# Altium PCB Electro_tester.PcbDoc
Units mm, origin at the board's own origin, x right, y up, seen from the top; angles counter-clockwise.
Board outline 152.4 x 101.6 mm, 2 copper layers (Top Layer, Bottom Layer); 66 components, 44 nets, 230 pads, 0 vias.
Unrouted connection lines stored in the file: 139.
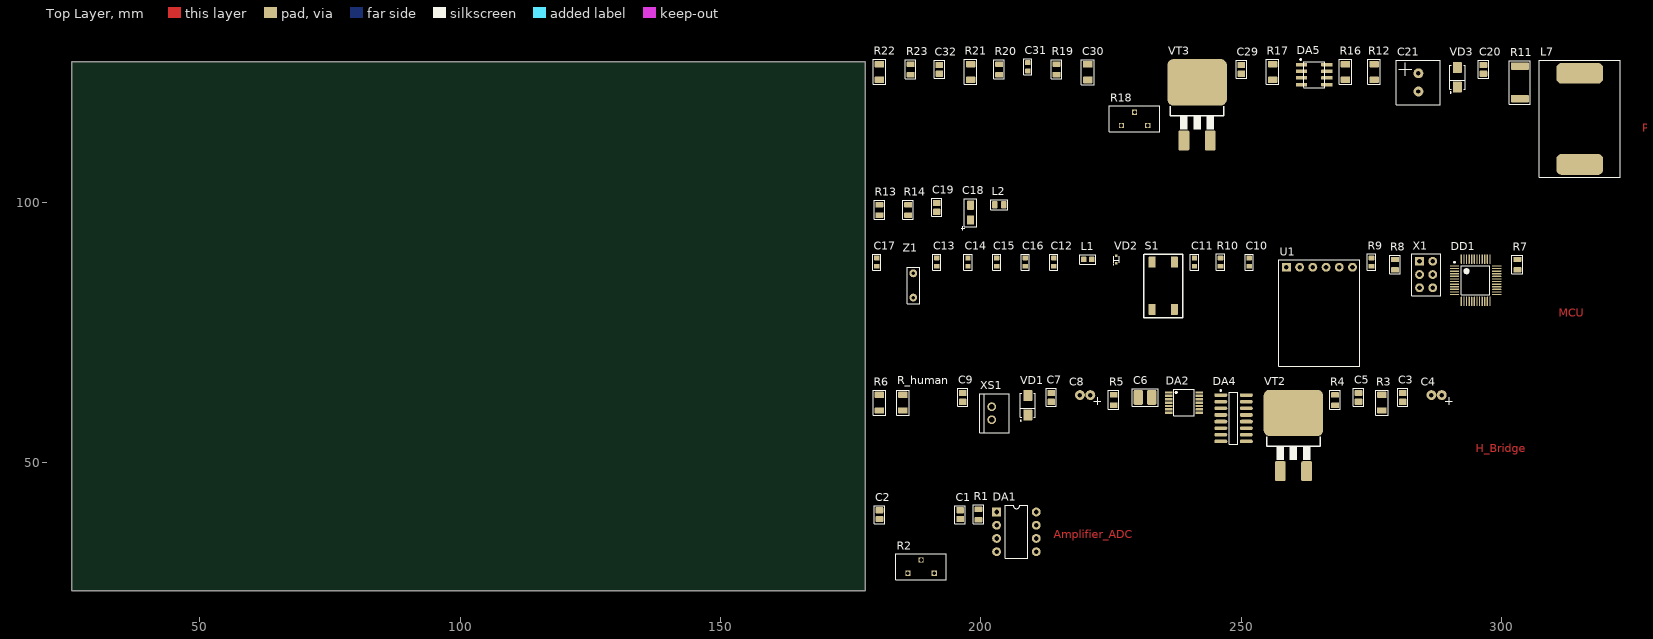
[diagram p0: Top Layer view]
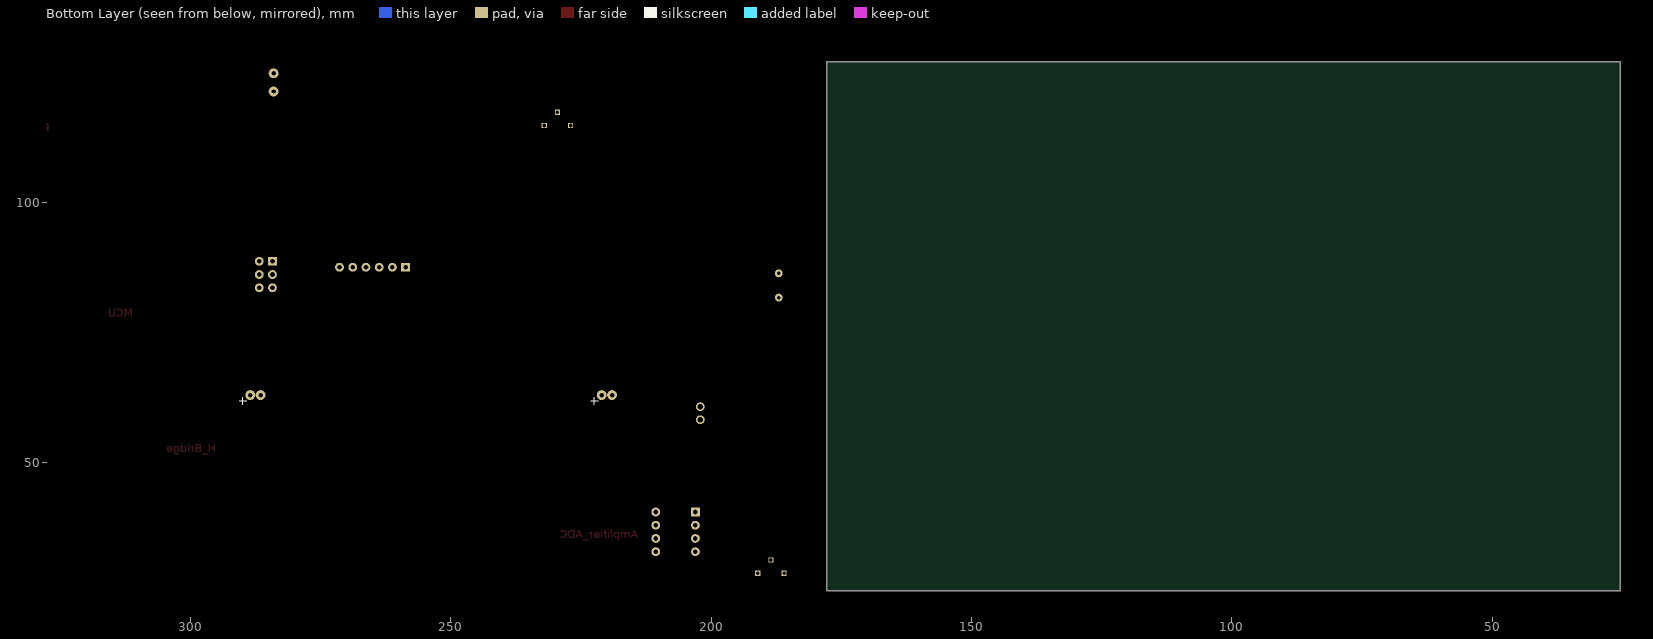
[diagram p1: Bottom Layer view, seen from below]

## Layer stack, top to bottom
Top Solder: solder mask 0.0102, Solder Resist, Dk 3.5
Top Layer: signal copper 0.0356
Dielectric 1: dielectric 0.32, FR-4, Dk 4.8
Bottom Layer: signal copper 0.0356
Bottom Solder: solder mask 0.0102, Solder Resist, Dk 3.5

## Board outline
25.4,25.4 177.8,25.4 177.8,127 25.4,127

## Design rules (kind name [scope] priority, off if disabled: settings)
Clearance [All] p1: gap=0.254 ignorepadtopadclearanceinfootprint=FALSE except(0: Arc-Hole Track-Hole SMDPad-Hole THPad-Hole Via-Hole Fill-Hole Poly-Hole Region-Hole Text-Hole)
PolygonConnect [All] p1: connectstyle=Relief reliefconductorwidth=0.254 reliefentries=4 polygonreliefangle="90 Angle" airgapwidth=0.254
RoomDefinition PWM_Controller [InComponentClass('PWM_Controller')] p1: confinementstyle=ConfineIn formatcopy=TRUE lockcomponents=FALSE outline 179,104.5 322.999,104.5 322.999,130.5 179,130.5
RoomDefinition Power [InComponentClass('Power')] p2: confinementstyle=ConfineIn formatcopy=TRUE lockcomponents=FALSE outline 179,94 206,94 206,104 179,104
RoomDefinition MCU [InComponentClass('MCU')] p3: confinementstyle=ConfineIn formatcopy=TRUE lockcomponents=FALSE outline 178.5,68 305.499,68 305.499,93 178.5,93
RoomDefinition H_Bridge_Driver [InComponentClass('H_Bridge_Driver')] p4: confinementstyle=ConfineIn formatcopy=TRUE lockcomponents=FALSE outline 179,46 290.999,46 290.999,67.5 179,67.5
RoomDefinition Amplifier_ADC [InComponentClass('Amplifier_ADC')] p5: confinementstyle=ConfineIn formatcopy=TRUE lockcomponents=FALSE outline 179,27 212,27 212,45 179,45
RoutingVias [All] p1: holewidth=0.711 width=1.27 viastyle="Through Hole" minholewidth=0.711 minwidth=1.27 maxholewidth=0.711 maxwidth=1.27
SolderMaskExpansion [All] p1: expansion=0.102
Width [All] p1: maxlimit=0.254 minlimit=0.254 preferedwidth=0.254
30 further rules are at their usual default settings.

## Classes and differential pairs
component class PWM_Controller: C20 C21 C29 C30 C31 C32 DA5 L7 R11 R12 R16 R17 R18 R19 R20 R21 R22 R23 VD3 VT3
component class Power: C18 C19 L2 R13 R14
component class MCU: C10 C11 C12 C13 C14 C15 C16 C17 DD1 L1 R7 R8 R9 R10 S1 U1 VD2 X1 Z1
component class H_Bridge_Driver: C3 C4 C5 C6 C7 C8 C9 DA2 DA4 R3 R4 R5 R6 R_human VD1 VT2 XS1
component class Amplifier_ADC: C1 C2 DA1 R1 R2

## Components (designator, comment, footprint, x,y, rotation, side; value= is the part's Value field where it differs from the comment)
C1 "Capacitor" C0805 196,40 r90 top value=1мк
C2 "Capacitor" C0805 180.5,40 r90 top value=0,1мк
C3 "Capacitor" C0805 280.999,62.5 r90 top value=0,1мк
C4 "Capacitor" K50-35(5X11) 287.499,63.5 r90 top value=22мк
C5 "Capacitor" C0805 272.499,62.5 r90 top value=0,1мк
C6 "Capacitor" C1210 231.5,62.5 r0 top value=0,1мк
C7 "Capacitor" C0805 213.5,62.5 r90 top value=0,1мк
C8 "Capacitor" K50-35(5X11) 220,63.5 r90 top value=22мк
C9 "Capacitor" C0805 196.5,62.5 r90 top value=0,1мк
C10 "Capacitor" C0603 251.499,88.5 r90 top value=0,1мк
C11 "Capacitor" C0603 241,88.5 r90 top value=0,1мк
C12 "Capacitor" C0603 214,88.5 r90 top value=22
C13 "Capacitor" C0603 191.5,88.5 r90 top value=0,1мк
C14 "Capacitor" C0603 197.5,88.5 r90 top value=0,1мк
C15 "Capacitor" C0603 203,88.5 r90 top value=0,1мк
C16 "Capacitor" C0603 208.5,88.5 r90 top value=0,1мк
C17 "Capacitor" C0603 180,88.5 r90 top value=22
C18 "Capacitor_pol" "TANTAL CASE A" 198,98 r90 top value=10мк
C19 "Capacitor" C0805 191.5,99 r90 top value=4,7мк
C20 "Capacitor" C0805 296.499,125.5 r90 top value=0,1мк
C21 "Capacitor_pol" K50-35(8X16) 283.999,123 r0 top value=4,7мк
C29 "Capacitor" C0805 249.999,125.5 r90 top value=4700
C30 "Capacitor" C1206 220.5,125 r90 top value=0,1мк
C31 "Capacitor" C0603 209,126 r90 top value=100
C32 "Capacitor" C0805 192,125.5 r90 top value=470
DA1 "INA122" DIP8 203,40.5 r0 top
DA2 "TXB0104" TSSOP14 239,61.5 r0 top
DA4 "IR2110S" SO16 248.5,58.5 r0 top
DA5 "UC384X" SO8 263.999,124.5 r0 top
DD1 "STM32F103C8T6TR" LQFP48 294.999,85 r0 top
L1 "Inductor" L0603 220.5,89 r0 top value=0
L2 "Inductor" L0805 203.5,99.5 r0 top value=0,18мкГн
L7 "Inductor" SDR2207 314.999,116 r0 top value=100мкГн
R1 "Resistor_0,125Вт" R0805 199.5,40 r90 top value=1к
R2 "Potentiometer" 3296Y 188.5,30 r90 top value=2к
R3 "Resistor_0,25Вт" R1206 276.999,61.5 r90 top value=0
R4 "Resistor_0,125Вт" R0805 267.999,62 r90 top value=47
R5 "Resistor_0,125Вт" R0805 225.5,62 r90 top value=1к
R6 "Resistor_0,25Вт" R1206 180.5,61.5 r90 top value=0
R7 "Resistor_0,125Вт" R0805 302.999,88 r90 top value=1к
R8 "Resistor_0,125Вт" R0805 279.499,88 r90 top value=2,4к
R9 "Resistor_0,062Вт" R0603 274.999,88.5 r90 top value=10к
R10 "Resistor_0,062Вт" R0603 246,88.5 r90 top value=10к
R11 "Resistor_1Вт" R2512 303.499,123 r90 top value=62к
R12 "Resistor_0,25Вт" R1206 275.499,125 r90 top value=1,2м
R13 "Resistor_0,125Вт" R0805 180.5,98.5 r90 top value=0
R14 "Resistor_0,125Вт" R0805 186,98.5 r90 top value=0
R16 "Resistor_0,25Вт" R1206 269.999,125 r90 top value=10к
R17 "Resistor_0,25Вт" R1206 255.999,125 r90 top value=0
R18 "Potentiometer" 3296Y 229.5,116 r90 top value=20к
R19 "Resistor_0,125Вт" R0805 214.5,125.5 r90 top value=20к
R20 "Resistor_0,125Вт" R0805 203.5,125.5 r90 top value=150
R21 "Resistor_0,25Вт" R1206 198,125 r90 top value=1к
R22 "Resistor_0,5Вт" R1206 180.5,125 r90 top value=0,47
R23 "Resistor_0,125Вт" R0805 186.5,125.5 r90 top value=10
R_human "Resistor_0,25Вт" R1206 185,61.5 r90 top value=0
S1 "RESET" Button_SMD 235,84 r90 top
U1 "USB UART" "USB UART CP2102" 264.999,87.5 r90 top
VD1 "Diode" SMA 209,61 r90 top
VD2 "DiodeSchottky" SOD-523 226,89 r90 top
VD3 "Diode" SMA 291.499,124 r90 top
VT2 "N-MOSFET" D2PAK 259.999,58.5 r0 top
VT3 "N-MOSFET" D2PAK 241.5,122 r0 top
X1 "Программатор" PLS2-6 285.499,86 r0 top
XS1 "Электроды" CWF-2 202.5,59.5 r0 top
Z1 "Crystal" HC-49S 187,84 r90 top

## Footprints (in the part's own frame and the unit in brackets; to place one, negate y for a bottom-side part, rotate by r counter-clockwise, add the part's x,y. Pads: shape width x height; smd on the part's side, far side on the other; paste and mask are expansions set on the pad)
3296Y [mm]
  rect 1x1 hole 0.7: 1(-1.27,2.54) 2(1.27,0) 3(-1.27,-2.54)
  silkscreen extent -2.5,-4.8 2.5,4.9, body extent -2.43,-4.76 2.4,4.76, height 11.52
Button_SMD [mm] "Кнопка"
  rrect25% 2.1x1.4 smd: 1(-4.6,2.15) 2(4.5,2.15) 3(-4.6,-2.15) 4(4.5,-2.15)
  silkscreen extent -6.22,-3.75 6,3.7, body extent -4.5,-3 4.5,3, height 7
C0603 [mm]
  rrect25% 0.94x1.03 smd: 1(-0.8,0) 2(0.8,0)
  silkscreen extent -1.55,-0.77 1.53,0.77, body extent -0.8,-0.4 0.8,0.4, height 0.9
C0805 [mm]
  rrect25% 1.21x1.46 smd paste-5: 1(-0.845,0) 2(0.845,0)
  silkscreen extent -1.73,-1 1.73,1, body extent -1,-0.62 1,0.63, height 0.78
C1206 [mm]
  rrect25% 1.28x1.87 smd: 1(-1.528,-0.024) 2(1.472,-0.024)
  silkscreen extent -2.47,-1.25 2.4,1.22, body extent -1.6,-0.85 1.6,0.85, height 1.75
C1210 [mm]
  rrect25% 1.76x2.82 smd paste-5: 1(-1.295,0) 2(1.295,0)
  silkscreen extent -2.45,-1.73 2.51,1.7, body extent -1.62,-1.27 1.57,1.23, height 1.65
CWF-2 [mm]
  round 1.7 hole 1: 1(-0.45,-1.275) 2(-0.45,1.225)
  silkscreen extent -2.75,-3.77 2.95,3.73, body extent -2.7,-3.73 3,3.78, height 7.7
D2PAK [mm]
  rrect25% 2.08x3.81 smd: 1(-2.54,-10.16) 3(2.54,-10.16)
  rrect25% 11.43x8.89 smd: 2(0,1.02)
  silkscreen extent -5.13,-8 5.13,-3.58, body extent -5.16,-11.25 5,4.01, height 5.03
DIP8 [mm]
  rect 1.7x1.7 hole 0.9: 1(0,0)
  round 1.7 hole 0.9: 2(0,-2.54) 3(0,-5.08) 4(0,-7.62) 5(7.62,-7.62) 6(7.62,-5.08) 7(7.62,-2.54) 8(7.62,0)
  silkscreen extent 1.68,-8.89 5.94,1.27, body extent -0.12,-8.51 7.75,0.89, height 4.36
HC-49S [mm] "Кварцевый резонатор"
  round 1.5 hole 0.7: 1(-2.325,0) 2(2.325,0)
  silkscreen extent -3.5,-1.2 3.5,1.2, body extent -5.67,-2.32 5.68,2.33, height 3.6
K50-35(5X11) [mm]
  round 1.9 hole 0.85: 1(-0.55,-1)
  round 1.9 hole 0.85 mask+0.102: 2(-0.55,1)
  silkscreen extent -2.4,-3 -1,-1.7, body extent -13.53,-2.53 -0.2,2.53, height 6.03
K50-35(8X16) [mm]
  round 1.9 hole 0.85 mask+0.102: 1(0,1.75)
  round 1.9 hole 0.85: 2(0,-1.75)
  silkscreen extent -4.25,-4.25 4.25,4.25, body extent -4,-4 4,4, height 16
L0603 [mm]
  rrect25% 1.05x1.07 smd paste-5: 1(-0.76,0) 2(0.76,0)
  silkscreen extent -1.53,-0.9 1.53,0.9, body extent -0.8,-0.4 0.8,0.4, height 0.8
L0805 [mm]
  rrect25% 1x1.4 smd: 1(-0.875,0) 2(0.875,0)
  silkscreen extent -1.63,-0.95 1.63,0.95, body extent -1,-0.6 1,0.6, height 0.95
LQFP48 [mm] "Thin QFP, 48-Leads, Body 7x7mm, Pitch 0.5mm, IPC Medium Density"
  oval 1.8x0.25 smd: 1(-4.05,2.75) 2(-4.05,2.25) 3(-4.05,1.75) 4(-4.05,1.25) 5(-4.05,0.75) 6(-4.05,0.25) 7(-4.05,-0.25) 8(-4.05,-0.75) 9(-4.05,-1.25) 10(-4.05,-1.75) 11(-4.05,-2.25) 12(-4.05,-2.75) 25(4.05,-2.75) 26(4.05,-2.25) 27(4.05,-1.75) 28(4.05,-1.25) 29(4.05,-0.75) 30(4.05,-0.25) 31(4.05,0.25) 32(4.05,0.75) 33(4.05,1.25) 34(4.05,1.75) 35(4.05,2.25) 36(4.05,2.75)
  oval 0.25x1.8 smd: 13(-2.75,-4.05) 14(-2.25,-4.05) 15(-1.75,-4.05) 16(-1.25,-4.05) 17(-0.75,-4.05) 18(-0.25,-4.05) 19(0.25,-4.05) 20(0.75,-4.05) 21(1.25,-4.05) 22(1.75,-4.05) 23(2.25,-4.05) 24(2.75,-4.05) 37(2.75,4.05) 38(2.25,4.05) 39(1.75,4.05) 40(1.25,4.05) 41(0.75,4.05) 42(0.25,4.05) 43(-0.25,4.05) 44(-0.75,4.05) 45(-1.25,4.05) 46(-1.75,4.05) 47(-2.25,4.05) 48(-2.75,4.05)
  silkscreen extent -4.17,-2.75 2.75,3.57, body extent -4.51,-4.51 4.51,4.51, height 1.46
PLS2-6 [mm] "Разъем для программатора ISP"
  rect 1.7x1.7 hole 0.9: 1(-1.275,2.64)
  round 1.7 hole 0.9: 2(1.265,2.64) 3(-1.275,0.1) 4(1.265,0.1) 5(-1.275,-2.44) 6(1.265,-2.44)
  silkscreen extent -2.73,-3.98 2.77,4.05, body extent -2.54,-3.81 2.54,3.81, height 8.54
R0603 [mm]
  rrect25% 0.92x1.08 smd: 1(-0.8,0) 2(0.8,0)
  silkscreen extent -1.55,-0.8 1.55,0.82, body extent -0.8,-0.4 0.8,0.4, height 0.5
R0805 [mm] "Chip Resistor, 2-Leads, Body 2,10x1,30mm, IPC Medium Density"
  rrect25% 1.02x1.53 smd paste-5: 1(-1.008,0) 2(1.008,0)
  silkscreen extent -1.78,-1 1.85,1.02, body extent -1.1,-0.7 1.1,0.7, height 0.55
R1206 [mm]
  rrect25% 1.2x1.83 smd: 1(-1.5,0) 2(1.5,0)
  silkscreen extent -2.4,-1.22 2.42,1.22, body extent -1.6,-0.8 1.6,0.8, height 0.55
R2512 [mm]
  rrect25% 1.45x3.43 smd: 1(-3.115,0) 2(3.115,0)
  silkscreen extent -4.2,-2 4.2,2.05, body extent -3.35,-1.6 3.35,1.6, height 0.55
SDR2207 [mm] "SMD Power Inductors"
  rrect50% 9x4 smd: 1(0,8.75) 2(0,-8.75)
  silkscreen extent -7.75,-11.25 7.75,11.25, body extent -7.5,-11 7.5,11, height 6
SMA [mm]
  rrect25% 2.17x1.74 smd: 1(-1.88,0) 2(1.88,0)
  silkscreen extent -3.04,-1.46 2.29,1.46, body extent -2.5,-1.35 2.5,1.35, height 2.15
SO8 [mm]
  rrect25% 2.17x0.68 smd: 1(-2.43,1.905) 2(-2.43,0.635) 3(-2.43,-0.635) 4(-2.43,-1.905) 5(2.43,-1.905) 6(2.43,-0.635) 7(2.43,0.635) 8(2.43,1.905)
  silkscreen extent -2.74,-2.5 2,3.02, body extent -3,-2.54 3,2.54, height 1.7
SO16 [mm] "16-Pin Small Outline Integrated Circuit 1.27 mm Pitch, IPC Low Density"
  oval 2.5x0.7 smd: 1(-2.45,4.445) 2(-2.45,3.175) 3(-2.45,1.905) 4(-2.45,0.635) 5(-2.45,-0.635) 6(-2.45,-1.905) 7(-2.45,-3.175) 8(-2.45,-4.445) 9(2.45,-4.445) 10(2.45,-3.175) 11(2.45,-1.905) 12(2.45,-0.635) 13(2.45,0.635) 14(2.45,1.905) 15(2.45,3.175) 16(2.45,4.445)
  silkscreen extent -2.57,-5 0.8,5.47, body extent -3.07,-4.99 3.07,4.98, height 1.78
SOD-523 [mm]
  rrect25% 0.5x0.5 smd: 1(-0.7,0) 2(0.7,0)
  silkscreen extent -1.04,-0.55 0.65,0.62, body extent -0.8,-0.4 0.8,0.4, height 0.7
"TANTAL CASE A" [mm]
  rrect25% 1.81x1.36 smd: 1(-1.425,0) 2(1.425,0)
  silkscreen extent -3.37,-1.2 2.7,1.82, body extent -1.7,-0.9 1.7,0.9, height 1.8
TSSOP14 [mm]
  rrect25% 1.45x0.45 smd: 1(-2.95,1.95) 2(-2.95,1.3) 3(-2.95,0.65) 4(-2.95,0) 5(-2.95,-0.65) 6(-2.95,-1.3) 7(-2.95,-1.95) 8(2.95,-1.95) 9(2.95,-1.3) 10(2.95,-0.65) 11(2.95,0) 12(2.95,0.65) 13(2.95,1.3) 14(2.95,1.95)
  silkscreen extent -2,-2.55 2,2.55, body extent -3.2,-2.5 3.2,2.5, height 1.2
"USB UART CP2102" [mm]
  rect 1.7x1.7 hole 0.9: 1(0,6.345)
  round 1.7 hole 0.9: 2(0,3.805) 3(0,1.265) 5(0,-3.815) 6(0,-6.355)
  round 1.7 hole 0.9 mask+0.102: 4(0,-1.275)
  silkscreen extent -19,-7.78 1.4,7.82, body extent -1.27,-7.58 1.27,7.66, height 8.54

## Part data
C1: library part cap151, "Конденсатор", Manufacture=Murata, Part Name=Ceramic, Part Number=GRM21BR71H105K, Voltage=50B, id=cap151, TKE=X7R
C2 C3 C5 C7 C9 C20: library part cap160, "Конденсатор", Manufacture=Murata, Part Name=Ceramic, Part Number=GRM21BR71H104KA01L, Voltage=50В, id=cap160, TKE=X7R
C4 C8: library part cap238, "Конденсатор", Manufacture=Yageo, Part Name=Electrolit, Part Number=SJ050M0022B2F-0511, Voltage=50В, id=cap238, tga=0.20%
C6: library part cap237, "Конденсатор", Manufacture=Kemet, Part Name=Ceramic, Part Number=C1210C104KCRACTU, Voltage=500В, id=cap237, TKE=X7R
C10 C11 C13 C14 C15 C16: library part cap131, "Конденсатор", Manufacture=Murata, Part Name=Ceramic, Part Number=GRM188R71H104KA93D, Voltage=50B, id=cap131, TKE=X7R
C12 C17: library part cap77, "Конденсатор", Manufacture=Yageo, Part Name=Ceramic, Part Number=CC0603JRNPO9BN220, Voltage=50B, id=cap77, TKE=NP0
C18: library part cap199, "Конденсатор полярный", Manufacture=Vishay, Part Name=Tantal, Part Number=293D106X9016A2TE3, Voltage=16В, id=cap199
C19: library part cap153, "Конденсатор", Manufacture=Murata, Part Name=Ceramic, Part Number=GRM21BR61E475KA12L, Voltage=25B, id=cap153, TKE=X5R
C21: library part cap235, "Конденсатор полярный", Manufacture=Jamicon, Part Name=Electrolit, Part Number=TKR4R7M2WF16, Voltage=450В, id=cap235, tga=0.20%
C29: library part cap169, "Конденсатор", Manufacture=Murata, Part Name=Ceramic, Part Number=GRM216R71H472K, Voltage=50В, id=cap169, TKE=X7R
C30: library part cap179, "Конденсатор", Manufacture=Murata, Part Name=Ceramic, Part Number=GRM31CR72E104K, Voltage=250В, id=cap179, TKE=X7R
C31: library part cap91, "Конденсатор", Manufacture=Murata, Part Name=Ceramic, Part Number=GRM1885C1H101J, Voltage=50B, id=cap91, TKE=NP0
C32: library part cap162, "Конденсатор", Manufacture=Murata, Part Name=Ceramic, Part Number=GRM216R71H471K, Voltage=50В, id=cap162, TKE=X7R
DA1: library part amp12, "Low Cost Low Power  Instrumentation Amplifier", Input Bias Current=25nA, Manufacture="Texas Instruments", Offset voltage=0,25mB, Part Name="Instrumentation Amplifier", Part Number=INA122P, Supply Current max=85uA, Supply Voltage="2,2В–36В or -0,9/+1,3В to (+-)18B", Bandwidth="g=5 120kHz, g=100 5kHz, g=500 0,9kHz", Channels=1, CMRR=96dB, id=amp12, Rail-to-rail=yes
DA2: library part pwr48, "4-Bit Bidirectional Voltage-level Translator", Current=50mA, Input Voltage=1,2-3,6B, Manufacturer="Texas Instruments", Output Voltage=1,65-5,5B, Part Name="4 4-Bit Bidirectional Voltage-level Translator", Part Number=TXB0104PWR, id=pwr48, Type=Isolated
DA4: library part driver23, "Current Mode PWM  Controller for Forward and  Flyback Applications", Manufacture="International Rectifier", Maximum output current=2,5A, Max Operating Supply Voltage=20B, Min Operating Supply Voltage=10B, Part Name="High and Low side Driver", Part Number=IR2110STRPBF, id=driver23, Logic High=3-20B, Logic Low=1,5-8B
DA5: library part driver22, "Current Mode PWM  Controller for Forward and  Flyback Applications", Manufacture="ST Microelectronics", Max Operating Supply Voltage=9B, Min Operating Supply Voltage=7,8B, Part Name="PWM Controller for Forward and Flyback Applications", Part Number=UC3843BD1013TR, Duty Cycle max=1, id=driver22
DD1: library part microcont0, "Medium-density performance line ARM®-based 32-bit MCU with 64  or 128 KB Flash, USB, CAN, 7 timers, 2 ADCs, 9 com. interfaces", Frequency=72MHz, Part Name=Microcontroller, Power Supply="2.0-3.6 V", ADC=10x12b, Flash=64kb, id=microcont0, Interface="can, i2c, irda, lin, spi, uart, usb", Part Number=STM32F103C8T6TR, Pin in=37
L1: library part ind0, "EMI Suppression Filter", Part Name="EMI Suppression Filters", Part Number=BLM18PG181SN1D, Rated Current=1,5A, Resistance=0,09Ohm, id=ind0
L2: library part ind2, "EMI Suppression Filter", Part Number=CM201212-R18KL, Rated Current=120-540мА, id=ind2, Part Name=Inductor
L7: library part ind133, "EMI Suppression Filter", Manufacture=Bourns, Part Name="SMD Power Inductors", Part Number=SDR2207-101KL, Rated Current=2,2A, Resistance=0,168Ohm, Saturation Current=3A, id=ind133
R1 R5 R7: library part res73, "Резистор", Manufacture=Yageo, Part Name=Resistor, Part Number=RC0805FR-071KL, Power=0,125Вт, Accuracy=0.01, id=res73
R2: library part res986, Manufacture=Bourns, Part Name=Resistor, Part Number=3296Y-1-202LF, Power=0,5Вт, Accuracy=0.1, id=res986
R3 R6 R17 R_human: library part res579, "Резистор", Manufacture=Yageo, Part Name=Resistor, Part Number=RC1206FR-070RL, Power=0,25Вт, Accuracy=0.01, id=res579
R4: library part res41, "Резистор", Manufacture=Yageo, Part Name=Resistor, Part Number=RC0805FR-0747RL, Power=0,125Вт, Accuracy=0.01, id=res41
R8: library part res82, "Резистор", Manufacture=Yageo, Part Name=Resistor, Part Number=RC0805FR-072K4, Power=0,125Вт, Accuracy=0.01, id=res82
R9 R10: library part res483, "Резистор", Manufacture=Yageo, Part Name=Resistor, Part Number=RC0603FR-0710KL, Power=0,062Вт, Accuracy=0.01, id=res483
R11: library part res888, "Резистор", Manufacture=Yageo, Part Name=Resistor, Part Number=RC2512FR-0762KL, Power=1Вт, Accuracy=0.01, id=res888
R12: library part res726, "Резистор", Manufacture=Yageo, Part Name=Resistor, Part Number=RC1206FR-071M2, Power=0,25Вт, Accuracy=0.01, id=res726
R13 R14: library part res0, "Резистор", Manufacture=Yageo, Part Name=Resistor, Part Number=RC0805FR-070RL, Power=0,125Вт, Accuracy=0.01, id=res0
R16: library part res676, "Резистор", Manufacture=Yageo, Part Name=Resistor, Part Number=RC1206FR-0710KL, Power=0,25Вт, Accuracy=0.01, id=res676
R18: library part res987, Manufacture=Bourns, Part Name=Resistor, Part Number=3296Y-1-203LF, Power=0,5Вт, Accuracy=0.1, id=res987
R19: library part res104, "Резистор", Manufacture=Yageo, Part Name=Resistor, Part Number=RC0805FR-0720KL, Power=0,125Вт, Accuracy=0.01, id=res104
R20: library part res53, "Резистор", Manufacture=Yageo, Part Name=Resistor, Part Number=RC0805FR-07150RL, Power=0,125Вт, Accuracy=0.01, id=res53
R21: library part res652, "Резистор", Manufacture=Yageo, Part Name=Resistor, Part Number=RC1206FR-071KL, Power=0,25Вт, Accuracy=0.01, id=res652
R22: library part res985, "Резистор", Manufacture=Yageo, Part Name=Resistor, Part Number=RL1206FR-7W0R47L, Power=0,5Вт, Accuracy=0.01, id=res985
R23: library part res25, "Резистор", Manufacture=Yageo, Part Name=Resistor, Part Number=RC0805FR-0710RL, Power=0,125Вт, Accuracy=0.01, id=res25
S1: library part btn4, "Кнопка", Part Name="Button 5mm", id=btn4
U1: library part module2, "USB UART module cp2102", Part Name="USB UART CP2102", id=module2
VD1 VD3: library part diode0, "Диод", Forward Current=1A, Forward Voltage=1,1B, Max Reverse Voltage=1000B, Part Number=GS1M, id=diode0, Part Name=Diode
VD2: library part diode12, "Диод Шоттки", Breakdown Current=600uA, Capacitance=25pF, Forward Current=1А, Forward Voltage=0,62B, Manufacture="NXP Semiconductor", Max Reverse Voltage=20B, Part Name="Diode Schottky", Part Number=PMEG2010AEB.115, id=diode12, Number of Channels=1
VT2 VT3: library part trans10, Continuous drain current=8A, Gate-to-source voltage=(+-)30B, Manufacturer=Vishay, Part Number=IRF840ASPBF, Power dissipation=125W, Pulsed drain current=32A, id=trans10, Rds=0,85Ohm, Structure=n-channel, V drain-source max=500B
X1: library part connect0, "Разъем - 6 конт. розетка", Part Name=MKII, Contact_1=+3,3В, Contact_2=SWCLK, Contact_3=GND, Contact_4=SWDIO, Contact_5=NRST, Contact_6=NC, id=connect0
XS1: library part connect15, "Разъем - 2 конт. вилка", Manufacture="Ningbo connfly electronic", Part Name=CWF-2, Part Number=DS1069-2MVW6X, Contact_1=Прямой, Contact_2=Ответный, Etch=2,5mm, id=connect15, Name=Электроды
Z1: library part crystal3, "Кварцевый резонатор", Frequence=8MHz, Part Number=8.000MHzHC-49US, id=crystal3

## Nets (pads, with @x,y where several pads share a name; then routed paths per layer and width w, separated by ;. In a path a pad name is that pad's centre, name@x,y a point inside that pad or via, vN(x,y) a via of type N, cw(c..) or ccw(c..) an arc to the next point about the centre after c; other vN are vias at no path point)
5B: C19.2 L2.1
+3,3В: C5.2 C11.2 C13.2 C14.2 C15.2 DA2.1 DA2.8 DD1.1 DD1.24 DD1.36 DD1.48 L1.1 R9.2 X1.1
+5B_D: C3.2 C4.2 C18.1 DA4.11 L2.2 VD2.2
+5В_AMP: C2.2 DA1.7
+12В: DA5.7 L7.1
+12В_DRIVER: C9.2 DA4.3 VD1.2
AGND_AMP: C1.1 C2.1 DA1.4 DA1.5 R14.2
AMPLIFIER+: DA1.3 R6.2 XS1.2
AMPLIFIER-: C3.1 C4.1 C9.1 C18.2 C19.1 C20.1 C21.2 C29.2 C32.2 DA1.2 DA4.2 DA4.13 DA4.15 DA5.5 R6.1 R13.1 R14.1 R19.1 R22.1 R23.1
DGND: C5.1 C10.1 C11.1 C12.2 C13.1 C14.1 C15.1 C16.1 C17.2 DA2.4 DA2.5 DA2.7 DA2.10 DA2.11 DA2.12 DD1.8 DD1.23 DD1.35 DD1.47 R8.1 R10.1 R13.2 S1.1 U1.5 X1.3
Electrode_1: C6.1 C7.1 C8.1 DA4.6 R5.1 VT2.3 XS1.1
HIGH_VOLTAGE: R3.2 R11.2 VT2.2
HIN_1: DA2.2 DD1.29
NetC6_2: C6.2 R3.1
NetC7_2: C7.2 C8.2 DA4.7 VD1.1
NetC12_1: C12.1 DD1.6 Z1.2
NetC16_2: C16.2 DD1.9 L1.2
NetC17_1: C17.1 DD1.5 Z1.1
NetC20_2: C20.2 C29.1 DA5.4 DA5.8 R16.1 R16.2
NetC21_1: C21.1 R11.1 R12.2 VD3.1
NetC30_1: C30.1 R21.1 R22.2 VT3.3
NetC30_2: C30.2 R17.1
NetC31_1: C31.1 DA5.1 R20.1
NetC31_2: C31.2 DA5.2 R18.2 R20.2
NetC32_1: C32.1 DA5.3 R21.2
NetDA1_1: DA1.1 R2.2 R2.3
NetDA1_6: DA1.6 R1.1
NetDA1_8: DA1.8 R2.1
NetDA2_13: DA2.13 DA4.12
NetDA4_8: DA4.8 R4.1
NetDA5_6: DA5.6 R19.2 VT3.1
NetDD1_11: DD1.11 R7.1 R8.2
NetDD1_44: DD1.44 R10.2
NetL7_2: L7.2 R17.2 VD3.2 VT3.2
NetR4_2: R4.2 R5.2 VT2.1
NetR12_1: R12.1 R18.1
NetR18_3: R18.3 R23.2
NetU1_6: U1.6 VD2.1
NRST: C10.2 DD1.7 R9.1 S1.4 X1.5
PA1_ADC_IN1: C1.2 R1.2 R7.2
RX1: DD1.43 U1.4
SWCLK: DD1.37 X1.2
SWDIO: DD1.34 X1.4
TX1: DD1.42 U1.3
pads on no net: DA2.3 DA2.6 DA2.9 DA2.14 DA4.1 DA4.4 DA4.5 DA4.9 DA4.10 DA4.14 DA4.16 DD1.2 DD1.3 DD1.4 DD1.10 DD1.12 DD1.13 DD1.14 DD1.15 DD1.16 DD1.17 DD1.18 DD1.19 DD1.20 DD1.21 DD1.22 DD1.25 DD1.26 DD1.27 DD1.28 DD1.30 DD1.31 DD1.32 DD1.33 DD1.38 DD1.39 DD1.40 DD1.41 DD1.45 DD1.46 R_human.1 R_human.2 S1.2 S1.3 U1.1 U1.2 X1.6

## Other copper
Top Layer:
  text "PWM_Controller" at 327,113.5 h1.52
  text "MCU" at 311,78 h1.52
  text "H_Bridge" at 295,52 h1.52
  text "Amplifier_ADC" at 214,35.5 h1.52